# Altium PCB VESC_POWER_75100.PcbDoc (part 1 of 2)
Units mil, origin at the board's own origin, x right, y up, seen from the top; angles counter-clockwise.
Board outline 2834.65 x 2047.24 mil, 4 copper layers (Top Layer, Layer 1, Layer 2, Bottom Layer), stack 62.599 mil thick; 50 components, 18 nets, 120 pads, 1348 vias.
Unrouted connection lines stored in the file: 2.
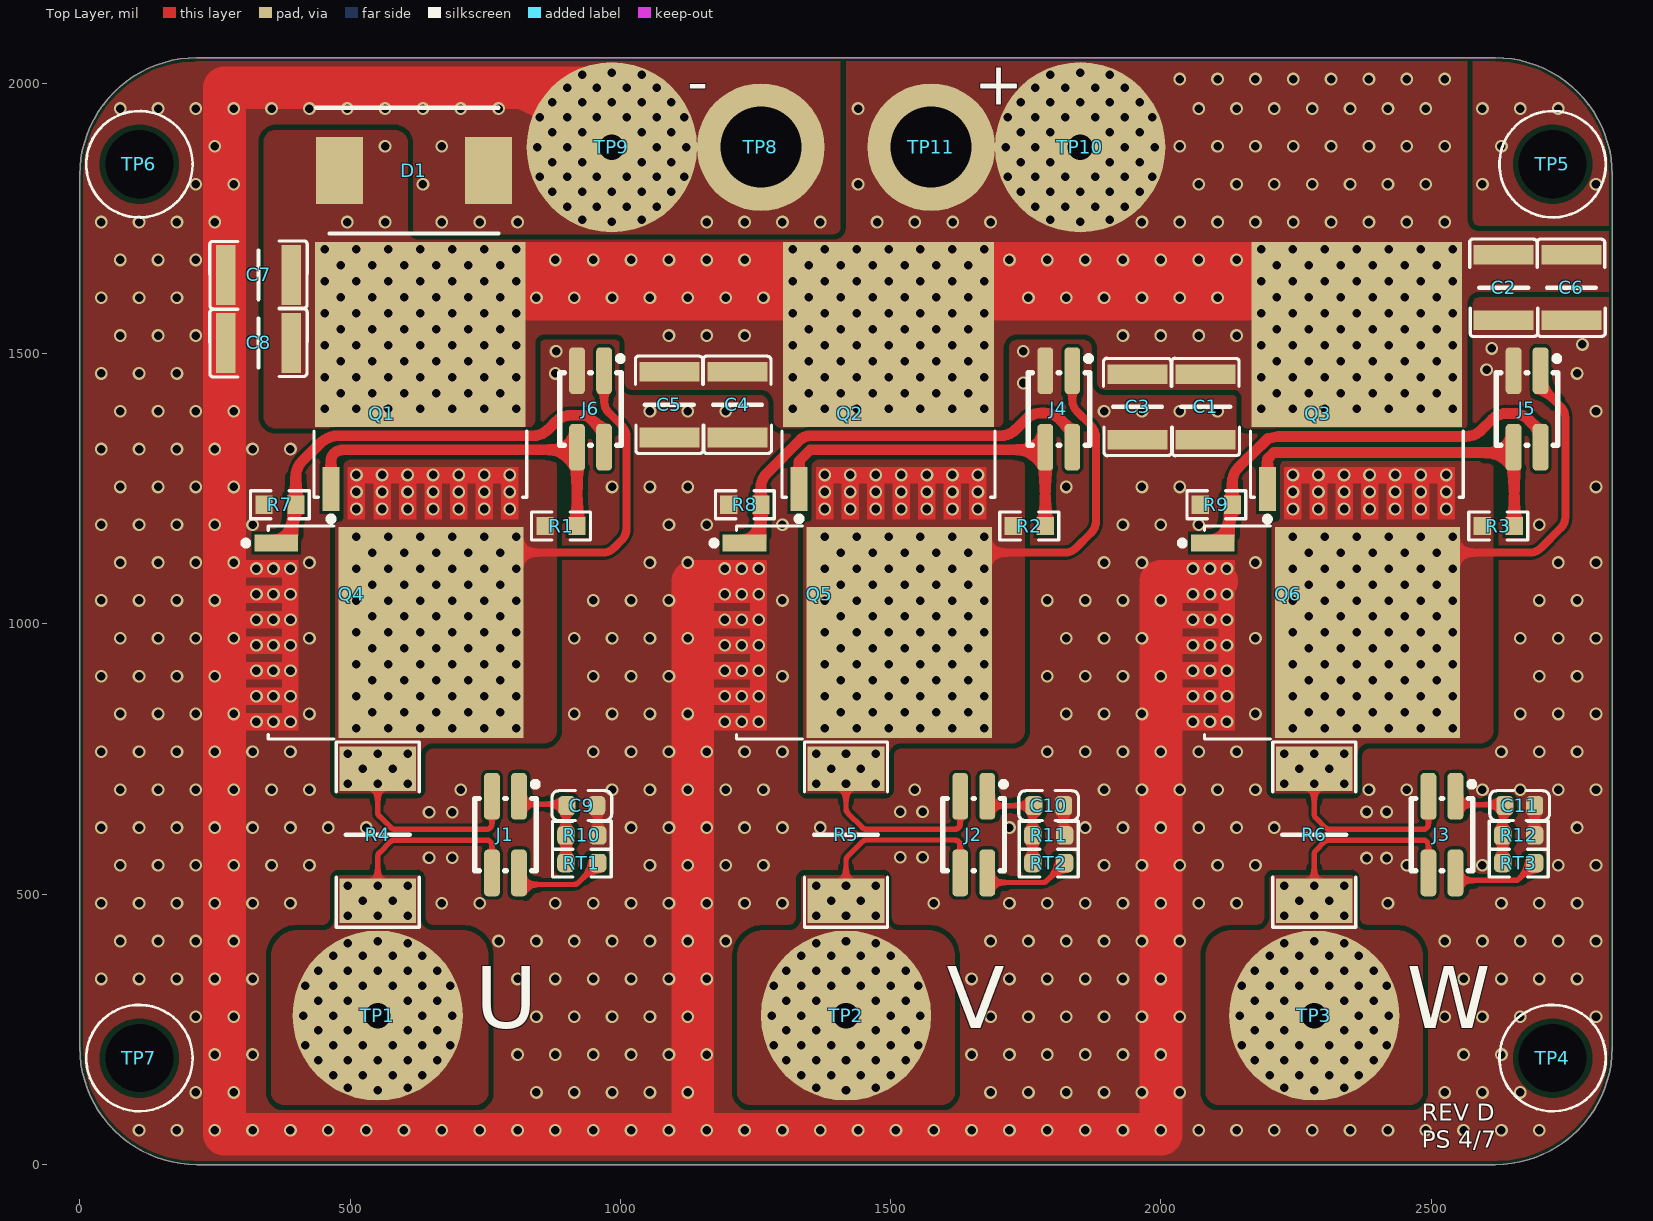
[diagram p0: Top Layer view]
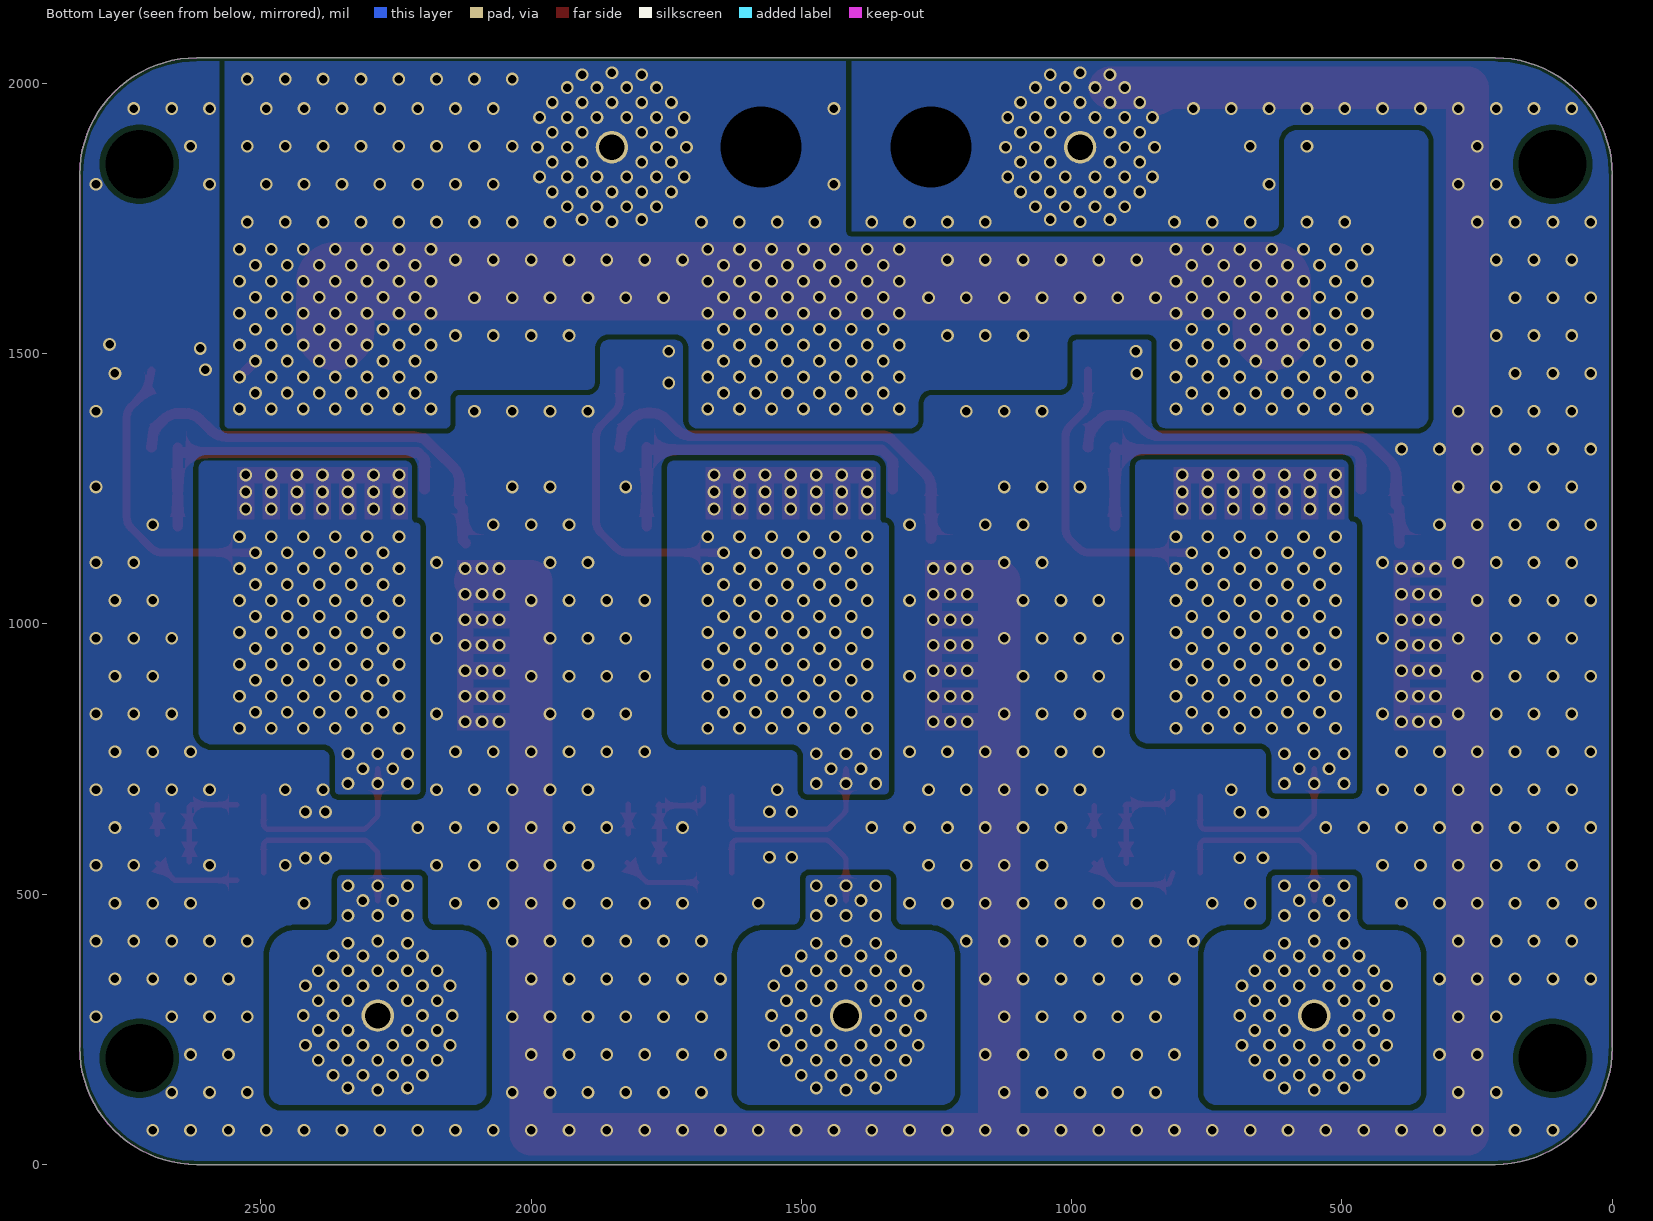
[diagram p1: Bottom Layer view, seen from below]
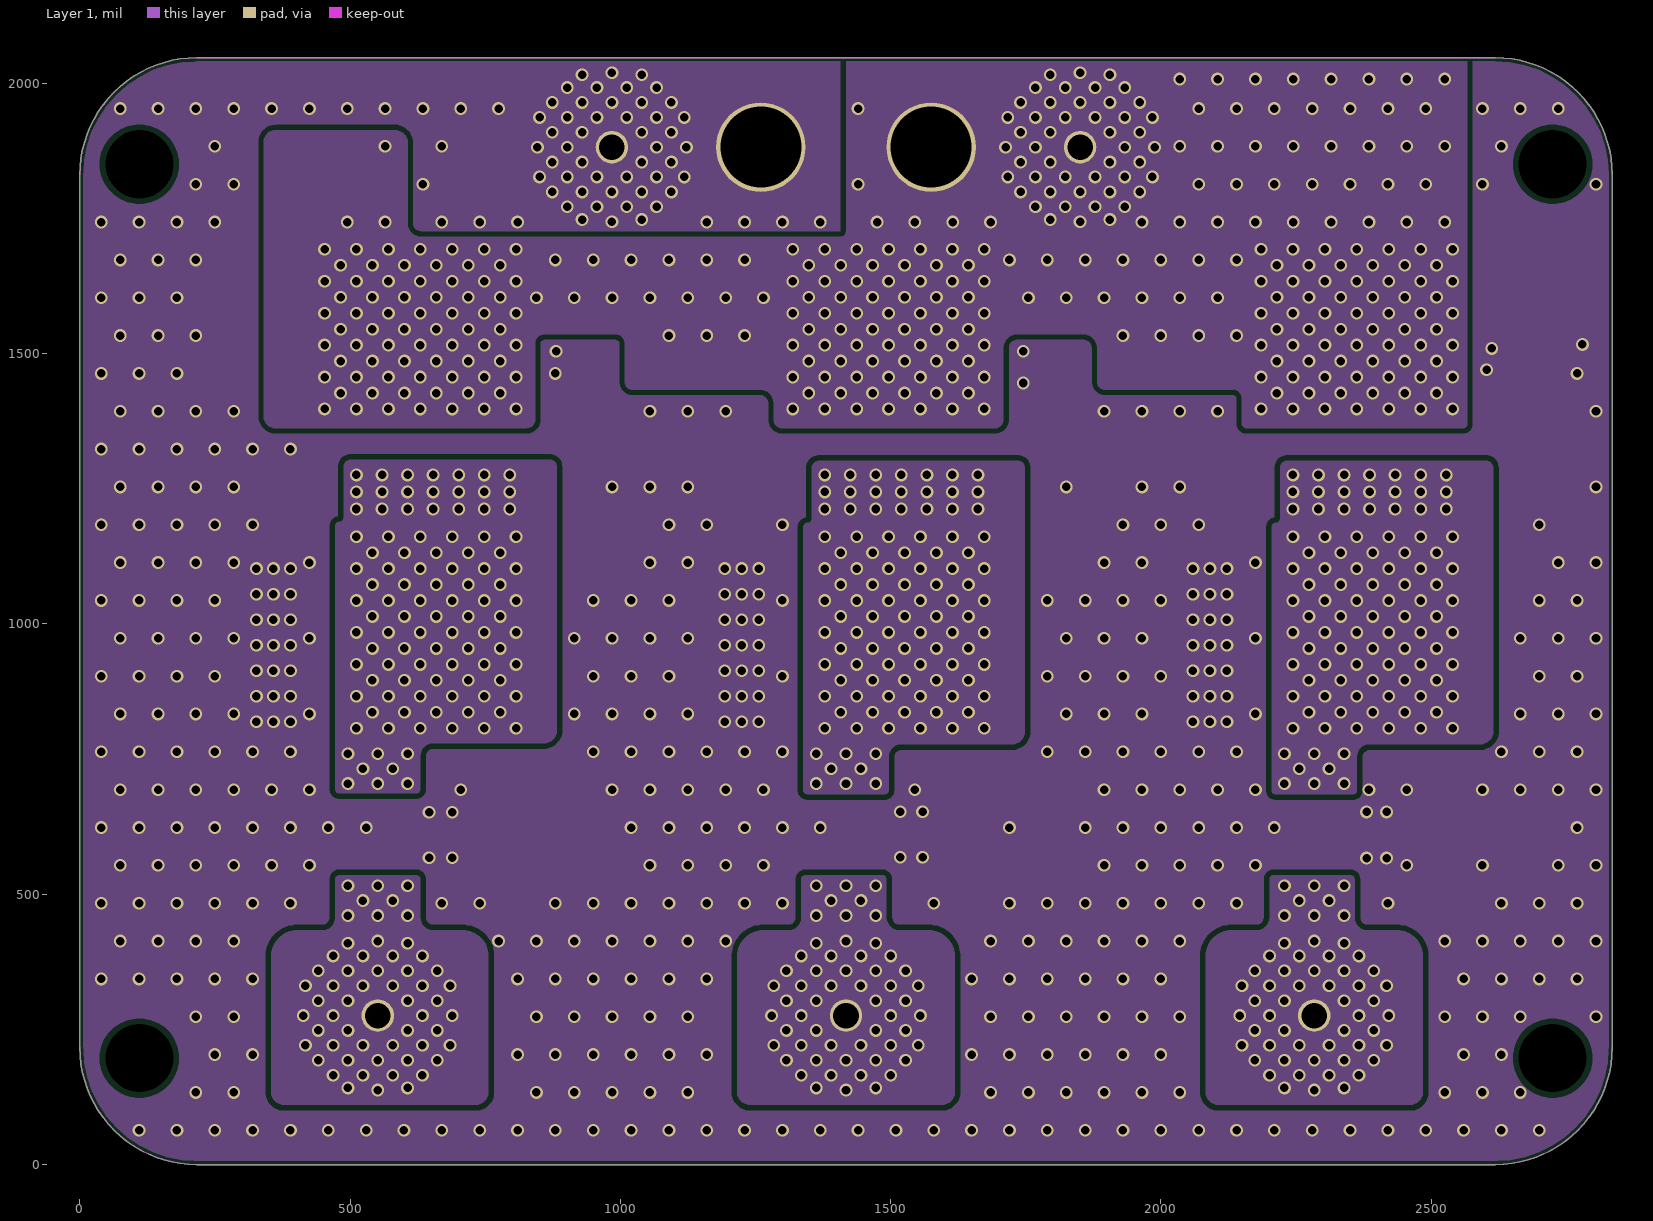
[diagram p2: Layer 1]
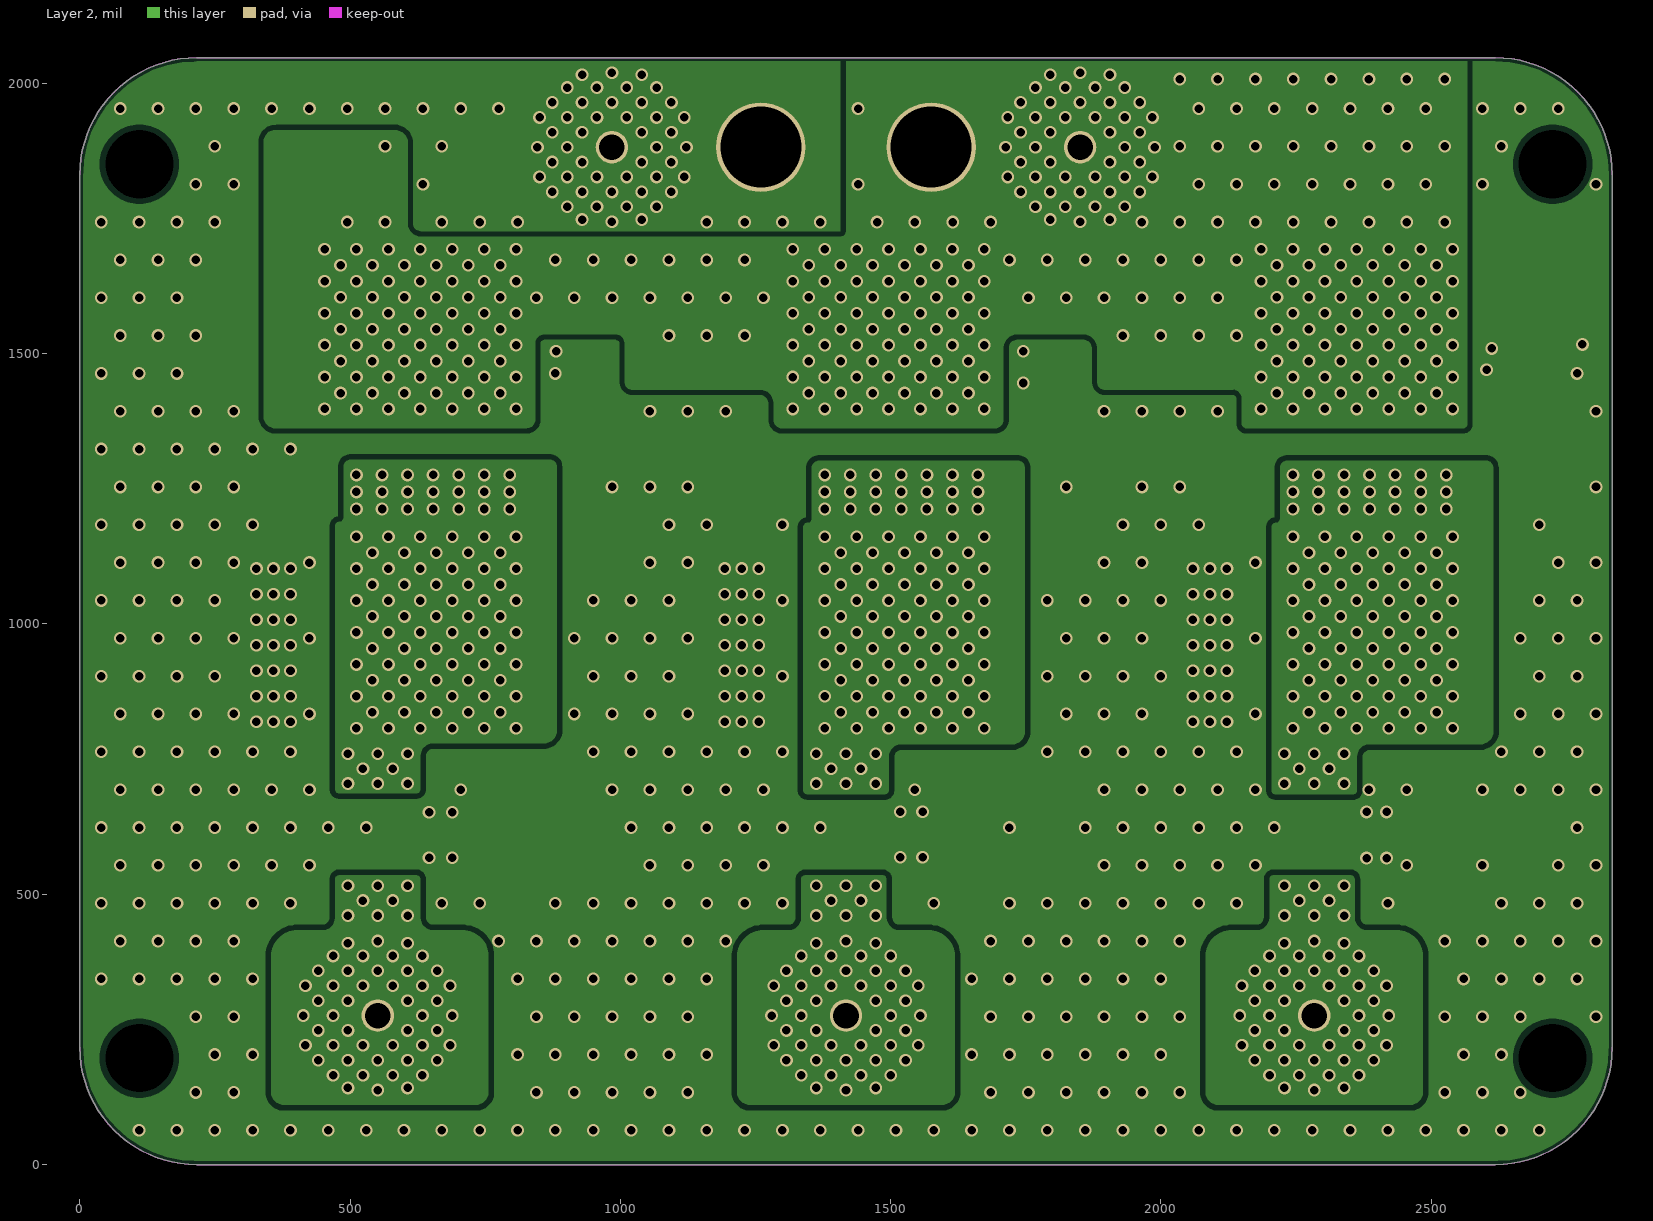
[diagram p3: Layer 2]
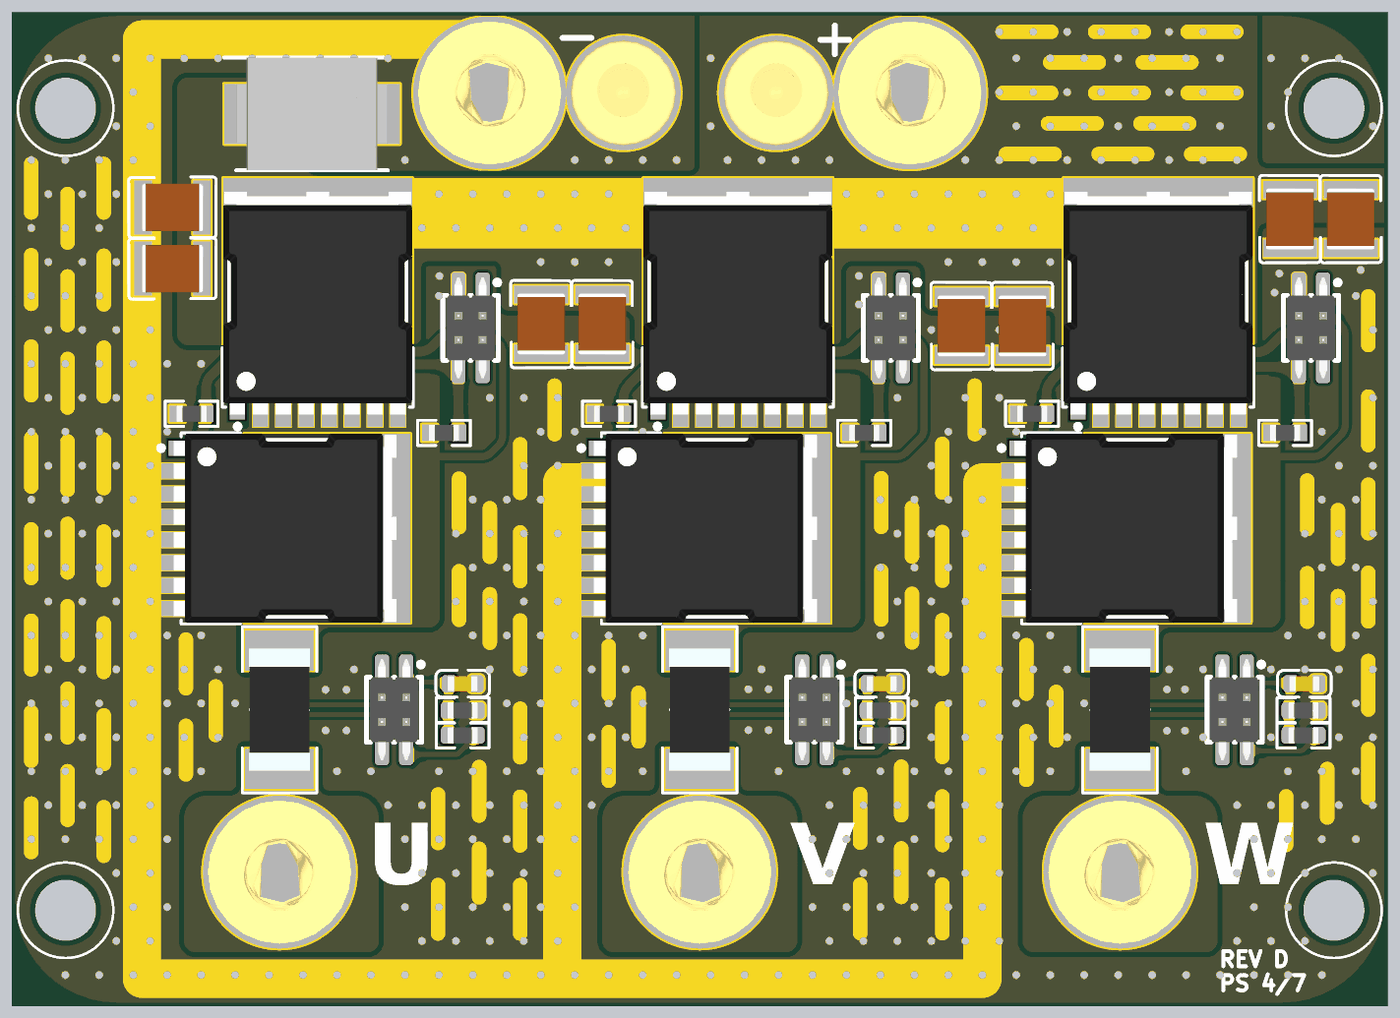
[diagram p5: 3D render of the assembled board from above, using the file's embedded part models]

## Layer stack, top to bottom
Top Solder: solder mask 0.4, Solder Resist, Dk 3.5
Top Layer: signal copper 1.378
Dielectric 2: prepreg 7.874, PP-022, Dk 4.5
Layer 1: signal copper 0.3937
Dielectric 1: core 43.3071, Core-024, Dk 4.6
Layer 2: signal copper 0.3937
Dielectric 3: prepreg 7.874, PP-022, Dk 4.5
Bottom Layer: signal copper 1.378
Bottom Solder: solder mask 0.4, Solder Resist, Dk 3.5

## Board outline
0,216.54 ccw(c216.54,216.54) 216.54,0 2618.11,0 ccw(c2618.11,216.54) 2834.65,216.54 2834.65,1830.71 ccw(c2618.11,1830.71) 2618.11,2047.24 216.54,2047.24 ccw(c216.54,1830.71) 0,1830.71

## Design rules (kind name [scope] priority, off if disabled: settings)
BoardOutlineClearance [All] p1: gap=10 ignorepadtopadclearanceinfootprint=FALSE except(0: Arc-SplitContinuation Track-SplitContinuation SMDPad-SplitContinuation THPad-SplitContinuation Via-SplitContinuation Fill-SplitContinuation Poly-SplitContinuation Region-SplitContinuation Text-SplitContinuation; 6: Arc-OutlineEdge Track-OutlineEdge SMDPad-OutlineEdge THPad-OutlineEdge Via-OutlineEdge Fill-OutlineEdge Poly-OutlineEdge Region-OutlineEdge Text-OutlineEdge)
Clearance [All] p1: gap=6 ignorepadtopadclearanceinfootprint=FALSE except(10: Fill-Fill Fill-Poly Fill-Region Fill-Text Fill-Hole Poly-Poly Poly-Region Poly-Text Poly-Hole Region-Region Region-Text Region-Hole)
HoleSize [All] p1: absolutevalues=TRUE maxlimit=196.85 minlimit=1 maxpercent=80.000 minpercent=20.000
HoleToHoleClearance [All] p1: gap=9 allowstackedmicrovias=TRUE
MinimumSolderMaskSliver [All] p1: minsoldermaskwidth=2
PolygonConnect [All] p1: connectstyle=Direct reliefconductorwidth=10 reliefentries=4 polygonreliefangle="90 Angle" airgapwidth=10
RoutingVias [All] p1: holewidth=28 width=50 viastyle="Through Hole" minholewidth=28 minwidth=50 maxholewidth=28 maxwidth=50
ShortCircuit ShortCircuit_1 [InComponent('JP1')] p1: allowed=TRUE
ShortCircuit [All] p2: allowed=FALSE
SilkToSilkClearance [All] p1: silktosilkclearance=0
SilkToSolderMaskClearance [IsPad] p1: minsilkscreentomaskgap=0 clearancetoexposedcopper=TRUE
SolderMaskExpansion [All] p1: expansion=4 istentingtop=FALSE
SupplyNets "Schematic Supply Nets_2" [InNet('VIN')] p1: voltage=0.000
SupplyNets "Schematic Supply Nets_1" [InNet('GND')] p2: voltage=0.000
SupplyNets "Schematic Supply Nets" [InNet('3V3')] p3: voltage=0.000
Width [All] p1: maxlimit=200 minlimit=6 preferedwidth=10
24 further rules are at their usual default settings.

## Components (designator, comment, footprint, x,y, rotation, side; value= is the part's Value field where it differs from the comment)
C1 "2.2uF/100V" CAPC3225X230N 2082.68,1401.57 r90 top
C2 "2.2uF/100V" CAPC3225X230N 2633.86,1622.05 r90 top
C3 "2.2uF/100V" CAPC3225X230N 1956.69,1401.58 r90 top
C4 "2.2uF/100V" CAPC3225X230N 1216.54,1405.51 r90 top
C5 "2.2uF/100V" CAPC3225X230N 1090.55,1405.51 r90 top
C6 "2.2uF/100V" CAPC3225X230N 2759.13,1622.05 r90 top
C7 "2.2uF/100V" CAPC3225X230N 330.71,1645.67 r0 top
C8 "2.2uF/100V" CAPC3225X230N 330.71,1519.69 r0 top
C9 "2.2uF/6.3V" C0603 928.68,663.93 r0 top
C10 "2.2uF/6.3V" C0603 1792.34,663.93 r0 top
C11 "2.2uF/6.3V" C0603 2663.55,663.93 r0 top
D1 "SMCJ75A" DIOM7959X262N 618.11,1838.58 r0 top
J1 "PZ127-2-02-S" HDR-SMD_4P-P1.27-V-M-R2-C2-LS5.3 787.4,610.24 r180 top locked
J2 "PZ127-2-02-S" HDR-SMD_4P-P1.27-V-M-R2-C2-LS5.3 1653.54,610.24 r180 top locked
J3 "PZ127-2-02-S" HDR-SMD_4P-P1.27-V-M-R2-C2-LS5.3 2519.68,610.24 r180 top locked
J4 "PZ127-2-02-S" HDR-SMD_4P-P1.27-V-M-R2-C2-LS5.3 1811.02,1397.64 r180 top
J5 "PZ127-2-02-S" HDR-SMD_4P-P1.27-V-M-R2-C2-LS5.3 2677.17,1397.64 r180 top
J6 "PZ127-2-02-S" HDR-SMD_4P-P1.27-V-M-R2-C2-LS5.3 944.88,1397.64 r180 top
Q1 "NCEP023N10LL" TOLL 629.92,1456.69 r90 top locked
Q2 "NCEP023N10LL" TOLL 1496.06,1456.69 r90 top locked
Q3 "NCEP023N10LL" TOLL 2362.2,1456.69 r90 top locked
Q4 "NCEP023N10LL" TOLL 570.87,984.25 r0 top locked
Q5 "NCEP023N10LL" TOLL 1437.01,984.25 r0 top locked
Q6 "NCEP023N10LL" TOLL 2303.15,984.25 r0 top locked
R1 "5.1K/1%" R0603#1 890.24,1181.1 r0 top
R2 "5.1K/1%" R0603#1 1756.38,1181.1 r0 top
R3 "5.1K/1%" R0603#1 2623.9,1181.1 r0 top
R4 "5mR/1%" R2512 551.18,610.24 r90 top locked
R5 "5mR/1%" R2512 1417.32,610.24 r90 top locked
R6 "5mR/1%" R2512 2283.46,610.24 r90 top locked
R7 "5.1K/1%" R0603#1 370.08,1220.47 r0 top
R8 "5.1K/1%" R0603#1 1230.2,1220.47 r0 top
R9 "5.1K/1%" R0603#1 2102.36,1220.47 r0 top
R10 "10K/1%" R0603#2 928.68,608.81 r180 top
R11 "10K/1%" R0603#2 1792.34,608.81 r180 top
R12 "10K/1%" R0603#2 2661.7,608.81 r180 top
RT1 "NTC" R0603#2 928.68,557.63 r180 top
RT2 "NTC" R0603#2 1792.34,557.63 r180 top
RT3 "NTC" R0603#2 2661.7,557.63 r180 top
TP1 "PHA" TP_8X8 551.18,275.59 r0 top locked
TP2 "PHB" TP_8X8 1417.32,275.59 r0 top locked
TP3 "PHC" TP_8X8 2283.46,275.59 r0 top locked
TP4 "TEST POINT" HOLE-3.2MM_M 2724.41,196.85 r0 top
TP5 "TEST POINT" HOLE-3.2MM_M 2724.41,1850.39 r0 top
TP6 "TEST POINT" HOLE-3.2MM_M 110.24,1850.39 r0 top
TP7 "TEST POINT" HOLE-3.2MM_M 110.24,196.85 r0 top
TP8 "VIN" TP_6x6 1259.84,1881.89 r180 top
TP9 "VIN" TP_8X8 984.25,1881.89 r180 top locked
TP10 "GND" TP_8X8 1850.39,1881.89 r180 top locked
TP11 "GND" TP_6x6 1574.8,1881.89 r180 top

## Footprints (in the part's own frame and the unit in brackets; to place one, negate y for a bottom-side part, rotate by r counter-clockwise, add the part's x,y. Pads: shape width x height; smd on the part's side, far side on the other; paste and mask are expansions set on the pad)
C0603 [mm] "C0603"
  rrect50% 0.8x0.9 smd: 1(-0.7,0) 2(0.7,0)
  silkscreen extent -1.41,-0.7 1.4,0.7, body extent -0.8,-0.41 0.8,0.41, height 0.9
CAPC3225X230N [mm]
  rect 0.92x2.82 smd: 1(-1.54,0) 2(1.54,0)
  silkscreen extent -2.3,-1.6 2.28,1.6, body extent -1.6,-1.25 1.6,1.25, height 2.47
DIOM7959X262N [mm]
  rect 2.2x3.15 smd: 1(-3.5,0) 2(3.5,0)
  silkscreen extent -4.6,-2.95 3.97,2.95, body extent -3.97,-2.95 3.97,2.95, height 2.31
HDR-SMD_4P-P1.27-V-M-R2-C2-LS5.3 [mm]
  rrect50% 0.74x2.2 smd paste+0 mask+0.05: 1(-0.635,-1.8) 2(-0.635,1.8) 3(0.635,-1.8) 4(0.635,1.8)
  silkscreen extent -1.52,-2.49 1.45,1.7, body extent -1.27,-2.65 1.27,2.65, height 5.5
HOLE-3.2MM_M [mm]
  round 0 hole 3.2 unplated: 1(0,0)
  silkscreen extent -2.5,-2.5 2.5,2.5
R0603#1 [mil] "R0603"
  rect 31.73x34.02 smd: 1(-29.65,0) 2(29.65,0)
  silkscreen extent -55,-26 55,26, body extent -31,-17 31,17, height 20
R0603#2 [mil] "R0603"
  rrect50% 31.73x34.02 smd: 1(-29.65,0) 2(29.65,0)
  silkscreen extent -55,-26 55,26, body extent -31,-17 31,17, height 20
R2512 [mm]
  rect 2.1x3.6 smd: 1(-3.1,0) 2(3.1,0)
  silkscreen extent -4.35,-1.95 4.35,1.95, body extent -3.2,-1.6 3.2,1.6, height 0.8
TOLL [mm] "TOLL"
  rect 2.063x0.8 smd: 1(-5.269,4.2)
  rect 8.7x9.9 smd: 2(2,0)
  oct 0.025x0.025 smd: 3(-5.46,-0.6)
  round 0.025 smd: 3(-5.46,-0.6)
  Top Layer region: -6.691,3.4 -4.228,3.4 -4.228,-4.6 -6.691,-4.6 -6.691,-3.8 -4.991,-3.8 -4.991,-3.4 -6.691,-3.4 -6.691,-2.6 -4.991,-2.6 -4.991,-2.2 -6.691,-2.2 -6.691,-1.4 -4.991,-1.4 -4.991,-1 -6.691,-1 -6.691,-0.2 -4.991,-0.2 -4.991,0.2 -6.691,0.2 -6.691,1 -4.991,1 -4.991,1.4 -6.691,1.4 -6.691,2.2 -4.991,2.2 -4.991,2.6 -6.691,2.6
  silkscreen extent -6.79,-5 -2.55,5, body extent -6.04,-4.95 5.63,4.95, height 2.3
TP_6x6 [mm] "TP_6x6"
  round 6 smd: 1(0,0)
  round 4.2 / inner round 4.2 / far side round 0 hole 3.8 mask+0.102: 1(0,0)
  body extent -2.75,-2.75 2.74,2.75, height 6
TP_8X8 [mm] "TP_8X8"
  round 8 smd: 1(0,0)
  round 1.524 hole 1.2: 1(0,0)
  body extent -3.75,-3.75 3.74,3.75, height 20

## Part data
C1 C2 C3 C4 C5 C6 C7 C8 C9 C10 C11: library part "CAP NP"
  C1 C2 C3 C4 C5 C6 C7 C8: PCB Footprint=C1206
  C9 C10 C11: PCB Footprint=C0603
D1: "TVS Diode (Uni-directional)", Manufacturer_Name=Bourns, Mouser Part Number=652-SMCJ75A, Arrow Part Number=SMCJ75A, Arrow Price/Stock=https://www.arrow.com/en/products/smcj75a/bourns?region=nac, Datasheet Link=https://www.bourns.com/docs/Product-Datasheets/SMCJ.pdf, Height=2.62mm, Manufacturer_Part_Number=SMCJ75A, Mouser Price/Stock=https://www.mouser.co.uk/ProductDetail/Bourns/SMCJ75A?qs=%252Bf8Cd6aE5bzxrdYbQ%252Bf9mA%3D%3D
J1 J2 J3 J4 J5 J6: Color=黑色, Current Rating (Max)=1A, JLCPCB Part Class="Extended Part", LCSC Part Name="2x2P 间距:1.27mm 方针 立贴", Manufacturer=HCTL(华灿天禄), Operating Temperature Range=-40℃~+105℃, Soldering Temperature(Max)=260℃@10S, Add into BOM=yes, Circluar Pins/Square Pins=方针, Contact Material=黄铜, Convert to PCB=yes, Datasheet=https://atta.szlcsc.com/upload/public/pdf/source/20230609/2ACB07ADC7D4DAF6D292F3D23C037F6C.pdf, Device=PZ127-2-02-S, Insulation Height=1.5mm, Length of End Connection Pin=-, Length of Mating Pin=4mm, Manufacturer Part=PZ127-2-02-S, Mounting Type=立贴, Number of Pins=4P, Number of Rows=双排, Pin Structure=2x2P, Pitch=1.27mm, Row Spacing=1.27mm, Supplier=LCSC, Supplier Footprint=SMD,P=1.27mm, Supplier Part=C3975185, Symbol=PZ127-2-02-S
Q1 Q2 Q3 Q4 Q5 Q6: library part "MOSFET N", PCB Footprint=TOLL
R1 R2 R3 R4 R5 R6 R7 R8 R9 R10 R11 R12: library part RESISTOR
  R1 R2 R3 R7 R8 R9 R10 R11 R12: PCB Footprint=R0603
  R4 R5 R6: PCB Footprint=R3920
TP1 TP2 TP3 TP8 TP9 TP10 TP11: library part "TEST POINT", PCB Footprint=TP_8x8
RT1 RT2 RT3: PCB Footprint=R0603

## Via types
v1: diameter 23.62, hole 15.75, Top Layer to Bottom Layer, tented both sides, 1348 vias

## Nets (pads, with @x,y where several pads share a name; then routed paths per layer and width w, separated by ;. In a path a pad name is that pad's centre, name@x,y a point inside that pad or via, vN(x,y) a via of type N, cw(c..) or ccw(c..) an arc to the next point about the centre after c; other vN are vias at no path point)
3V3: J1.2 J2.2 J3.2 RT1.1 RT2.1 RT3.1 | length 478.8
  Top Layer w10: J1.2@812.4,539.37 819.69,520.14 820.67,519.53 ccw(c825.94,528.03) 825.94,518.03 914.59,518.03 ccw(c914.59,528.03) 921.65,520.95 RT1.1@958.33,557.63 ; J2.2@1692.91,521.66 1781.43,521.66 ccw(c1781.43,531.66) 1788.48,524.57 1814.05,550.14 RT2.1@1821.98,558.07 ; J3.2@2544.68,525.65 2655.22,525.65 ccw(c2655.22,535.65) 2662.27,528.56 RT3.1@2691.34,557.63
ADC_TEMP: C9.1 J1.1 R10.2 RT1.2 | length 213.5
  Top Layer w10: J1.1@813.07,689.86 813.07,675.55 821.79,666.82 898.23,666.82 C9.1@901.12,663.93 ; RT1.2@899.04,557.63 R10.2@899.04,608.81 C9.1@899.04,663.93
ADC_TEMP2: C10.1 J2.1 R11.2 RT2.2 | length 218.2
  Top Layer w10: J2.1@1681.09,696.12 1681.09,670.77 1687.94,663.93 C10.1@1764.78,663.93 ; RT2.2@1762.69,560.32 1762.69,611.5 C10.1@1762.69,666.62
ADC_TEMP3: C11.1 J3.1 R12.2 RT3.2 | length 191.1
  Top Layer w10: J3.1@2544.64,665.67 2628.11,665.67 2632.05,662.1 R12.2@2632.05,608.81 RT3.2@2632.05,559.74
GHA: J6.4 Q1.1 R1.2 | length 652.2
  Top Layer w20: Q1.1@464.57,1249.25 464.57,1301.32 cw(c484.57,1301.26) 477.85,1320.09 cw(c489.89,1286.28) 489.89,1322.17 915.31,1322.17 J6.4@919.88,1326.77 ; R1.2@919.88,1181.1 J6.4@919.88,1312.56
GHB: J4.4 Q2.1 R2.2 | length 659.8
  Top Layer w20: Q2.1@1330.71,1249.25 1330.71,1301.81 1351.07,1322.17 1377.95,1322.17 1781.46,1322.17 J4.4@1783.82,1322.17 ; R2.2@1786.02,1181.1 J4.4@1786.02,1326.77
GHC: J5.4 Q3.1 R3.2 | length 661.7
  Top Layer w20: Q3.1@2196.85,1249.25 2196.85,1303.18 cw(c2210.58,1303.18) 2197.03,1305.37 2208.39,1316.73 cw(c2210.58,1303.18) 2210.58,1316.91 J5.4@2653.54,1316.91 ; R3.2@2653.54,1181.1 J5.4@2653.54,1325.39
GLA: J6.2 Q4.1 R7.2 | length 783.6
  Top Layer w20: Q4.1@393.7,1149.61 394.04,1155.35 394.04,1213.46 R7.2@399.72,1220.47 399.72,1272.92 cw(c439.72,1272.92) 411.41,1301.17 443.18,1332.95 cw(c481.97,1294.11) 463.94,1345.95 cw(c477.08,1308.17) 477.08,1348.17 838.15,1348.17 ccw(c838.15,1388.17) 866.4,1359.85 880.94,1374.4 cw(c909.19,1346.08) 909.19,1386.08 930.64,1386.08 cw(c930.64,1366.08) 944.64,1380.36 965.31,1360.08 J6.2@969.88,1326.77
GLB: J4.2 Q5.1 R8.2 | length 770.7
  Top Layer w20: Q5.1@1259.84,1157.48 1259.84,1251.15 cw(c1299.84,1251.15) 1271.52,1279.4 1332.72,1340.59 cw(c1351.07,1322.17) 1351.07,1348.17 1703.12,1348.17 ccw(c1703.12,1388.17) 1731.37,1359.85 1750.07,1378.56 cw(c1778.32,1350.24) 1778.32,1390.24 1784.73,1390.24 cw(c1784.73,1350.24) 1812.98,1378.56 J4.2@1824.34,1367.19 ; J4.2@1824.37,1367.16 1831.46,1360.08 J4.2@1836.02,1326.77
GLC: J5.2 Q6.1 R9.2 | length 782.1
  Top Layer w20: Q6.1@2120.57,1149.61 2126.32,1155.35 2126.32,1213.46 R9.2@2132.01,1220.47 2132.01,1261.71 cw(c2172.01,1261.71) 2143.68,1289.95 cw(c2157.81,1275.79) 2143.82,1290.09 2197.8,1342.91 2217.21,1346.91 2564.3,1346.91 ccw(c2564.3,1386.91) 2592.55,1358.59 2611.76,1377.81 cw(c2640.01,1349.49) 2640.01,1389.49 2651.62,1389.49 cw(c2651.62,1349.49) 2679.87,1377.81 J5.2@2690.48,1367.19 ; J5.2@2690.51,1367.16 2697.6,1360.08 J5.2@2702.17,1326.77
GND: C1.1 C2.1 C3.1 C4.1 C5.1 C6.1 C7.1 C8.1 C9.2 C10.2 C11.2 D1.2 J4.3 J5.3 J6.3 Q4.3 Q5.3 Q6.3 R7.1 R8.1 R9.1 R10.1 R11.1 R12.1 TP8.1 TP9.1 | length 12017.4
  Top Layer w10: R10.1@958.33,608.81 C9.2@958.33,663.93 ; R11.1@1819.9,611.5 C10.2@1819.9,666.62 ; R12.1@2691.1,610.92 C11.2@2691.1,666.04
  Top Layer w78.74: 267.72,273.43 267.72,63.43 ; 267.72,483.43 267.72,63.43 ; 267.72,623.43 267.72,63.43 ; 267.72,833.43 267.72,63.43 ; 267.72,1043.43 267.72,63.43 ; 267.72,1183.43 267.72,63.43 ; 424.68,1992.13 267.72,1992.13 ; v1@529.68,55.66 267.72,55.66 ; 530.42,1992.13 267.72,1992.13 ; 634.68,1992.13 267.72,1992.13 ; TP9.1@929.13,1992.13 v1(901.57,1992.13) 810.42,1992.13 267.72,1992.13 ; v1@1159.68,55.66 1133.86,55.66 ; 1224.6,1078.74 1133.86,1078.74 1133.86,903.43 1133.86,763.43 1133.86,553.43 1133.86,273.43 1133.86,133.43 1133.86,55.66 ; v1@1439.68,55.66 1859.68,55.66 v1@2000,55.66 ; v1@1509.68,55.66 1133.86,55.66 ; 2000,133.43 v1@2000,55.66 ; 2102.76,1078.74 2000,1078.74 2000,973.43 2000,483.43 2000,343.43 v1@2000,55.66 ; 267.72,55.66 949.68,55.66 1133.86,55.66 ; 267.72,55.66 267.72,63.43 ; 267.72,63.43 267.72,1323.43 267.72,1795.28 267.72,1992.13
  other v1: 109.68,63.43 179.68,63.43 249.68,63.43 319.68,63.43 389.68,63.43 459.68,63.43 529.68,63.43 599.68,63.43 669.68,63.43 739.68,63.43 809.68,63.43 879.68,63.43 949.68,63.43 1019.68,63.43 1089.68,63.43 1159.68,63.43 1229.68,63.43 1299.68,63.43 1369.68,63.43 1439.68,63.43 1509.68,63.43 1579.68,63.43 1649.68,63.43 1719.68,63.43 1789.68,63.43 1859.68,63.43 1929.68,63.43 1999.68,63.43 2069.68,63.43 2139.68,63.43 2209.68,63.43 2279.68,63.43 2349.68,63.43 2419.68,63.43 2489.68,63.43 2559.68,63.43 2629.68,63.43 2699.68,63.43 214.68,133.43 284.68,133.43 844.68,133.43 914.68,133.43 984.68,133.43 1054.68,133.43 1124.68,133.43 1684.68,133.43 1754.68,133.43 1824.68,133.43 1894.68,133.43 1964.68,133.43 2034.68,133.43 2524.68,133.43 2594.68,133.43 2664.68,133.43 249.68,203.43 319.68,203.43 809.68,203.43 879.68,203.43 949.68,203.43 1019.68,203.43 1089.68,203.43 1159.68,203.43 1649.68,203.43 1719.68,203.43 1789.68,203.43 1859.68,203.43 1929.68,203.43 1999.68,203.43 2559.68,203.43 2629.68,203.43 214.68,273.43 284.68,273.43 844.68,273.43 914.68,273.43 984.68,273.43 1054.68,273.43 1124.68,273.43 1684.68,273.43 1754.68,273.43 1824.68,273.43 1894.68,273.43 1964.68,273.43 2034.68,273.43 2524.68,273.43 2594.68,273.43 2664.68,273.43 2804.68,273.43 39.68,343.43 109.68,343.43 179.68,343.43 249.68,343.43 319.68,343.43 809.68,343.43 879.68,343.43 949.68,343.43 1019.68,343.43 1089.68,343.43 1159.68,343.43 1649.68,343.43 1719.68,343.43 1789.68,343.43 1859.68,343.43 1929.68,343.43 1999.68,343.43 2559.68,343.43 2629.68,343.43 2699.68,343.43 2769.68,343.43 74.68,413.43 144.68,413.43 214.68,413.43 284.68,413.43 774.68,413.43 844.68,413.43 914.68,413.43 984.68,413.43 1054.68,413.43 1124.68,413.43 1194.68,413.43 1684.68,413.43 1754.68,413.43 1824.68,413.43 1894.68,413.43 1964.68,413.43 2034.68,413.43 2524.68,413.43 2594.68,413.43 2664.68,413.43 2734.68,413.43 2804.68,413.43 39.68,483.43 109.68,483.43 179.68,483.43 249.68,483.43 319.68,483.43 389.68,483.43 669.68,483.43 739.68,483.43 879.68,483.43 949.68,483.43 1019.68,483.43 1089.68,483.43 1159.68,483.43 1229.68,483.43 1299.68,483.43 1579.68,483.43 1719.68,483.43 1789.68,483.43 1859.68,483.43 1929.68,483.43 1999.68,483.43 2069.68,483.43 2139.68,483.43 2419.68,483.43 2629.68,483.43 2699.68,483.43 2769.68,483.43 74.68,553.43 144.68,553.43 214.68,553.43 284.68,553.43 354.68,553.43 424.68,553.43 1054.68,553.43 1124.68,553.43 1194.68,553.43 1264.68,553.43 1894.68,553.43 1964.68,553.43 2034.68,553.43 2104.68,553.43 2174.68,553.43 2454.68,553.43 2594.68,553.43 2734.68,553.43 2804.68,553.43 646.2,567.41 688.98,567.41 2380.26,566.93 2417.32,566.93 1517.69,568.32 1559.06,568.32 39.68,623.43 109.68,623.43 179.68,623.43 249.68,623.43 319.68,623.43 389.68,623.43 459.68,623.43 529.68,623.43 1019.68,623.43 1089.68,623.43 1159.68,623.43 1229.68,623.43 1299.68,623.43 1369.68,623.43 1719.68,623.43 1859.68,623.43 1929.68,623.43 1999.68,623.43 2069.68,623.43 2139.68,623.43 2209.68,623.43 2769.68,623.43 646.2,651.48 688.98,651.48 1517.69,652.4 1559.06,652.4 2380.26,652.21 2417.32,652.21 74.68,693.43 144.68,693.43 214.68,693.43 284.68,693.43 354.68,693.43 424.68,693.43 704.68,693.43 984.68,693.43 1054.68,693.43 1124.68,693.43 1194.68,693.43 1264.68,693.43 1544.68,693.43 1894.68,693.43 1964.68,693.43 2034.68,693.43 2104.68,693.43 2174.68,693.43 2384.68,693.43 2454.68,693.43 2594.68,693.43 2664.68,693.43 2734.68,693.43 2804.68,693.43 39.68,763.43 109.68,763.43 179.68,763.43 249.68,763.43 319.68,763.43 389.68,763.43 949.68,763.43 1019.68,763.43 1089.68,763.43 1159.68,763.43 1229.68,763.43 1299.68,763.43 1789.68,763.43 1859.68,763.43 1929.68,763.43 1999.68,763.43 2069.68,763.43 2139.68,763.43 2629.68,763.43 2699.68,763.43 2769.68,763.43 326.77,818.9 358.27,818.9 389.76,818.9 1192.91,818.9 1224.41,818.9 1255.91,818.9 2059.06,818.9 2090.55,818.9 2122.05,818.9 74.68,833.43 144.68,833.43 214.68,833.43 284.68,833.43 424.68,833.43 914.68,833.43 984.68,833.43 1054.68,833.43 1124.68,833.43 1824.68,833.43 1894.68,833.43 1964.68,833.43 2174.68,833.43 2664.68,833.43 2734.68,833.43 2804.68,833.43 326.77,866.14 358.27,866.14 389.76,866.14 1192.91,866.14 1224.41,866.14 1255.91,866.14 2059.06,866.14 2090.55,866.14 2122.05,866.14 39.68,903.43 109.68,903.43 179.68,903.43 249.68,903.43 949.68,903.43 1019.68,903.43 1089.68,903.43 1299.68,903.43 1789.68,903.43 1859.68,903.43 1929.68,903.43 1999.68,903.43 2699.68,903.43 2769.68,903.43 326.77,913.39 358.27,913.39 389.76,913.39 1192.91,913.39 1224.41,913.39 1255.91,913.39 2059.06,913.39 2090.55,913.39 2122.05,913.39 326.77,960.63 358.27,960.63 389.76,960.63 1192.91,960.63 1224.41,960.63 1255.91,960.63 2059.06,960.63 2090.55,960.63 2122.05,960.63 74.68,973.43 144.68,973.43 214.68,973.43 284.68,973.43 424.68,973.43 914.68,973.43 984.68,973.43 1054.68,973.43 1124.68,973.43 1824.68,973.43 1894.68,973.43 1964.68,973.43 2174.68,973.43 2664.68,973.43 2734.68,973.43 2804.68,973.43 326.77,1007.87 358.27,1007.87 389.76,1007.87 1192.91,1007.87 1224.41,1007.87 1255.91,1007.87 2059.06,1007.87 2090.55,1007.87 2122.05,1007.87 39.68,1043.43 109.68,1043.43 179.68,1043.43 249.68,1043.43 949.68,1043.43 1019.68,1043.43 1089.68,1043.43 1299.68,1043.43 1789.68,1043.43 1859.68,1043.43 1929.68,1043.43 1999.68,1043.43 2699.68,1043.43 2769.68,1043.43 326.77,1055.12 358.27,1055.12 389.76,1055.12 1192.91,1055.12 1224.41,1055.12 1255.91,1055.12 2059.06,1055.12 2090.55,1055.12 2122.05,1055.12 326.77,1102.36 358.27,1102.36 389.76,1102.36 1192.91,1102.36 1224.41,1102.36 1255.91,1102.36 2059.06,1102.36 2090.55,1102.36 2122.05,1102.36 74.68,1113.43 144.68,1113.43 214.68,1113.43 284.68,1113.43 424.68,1113.43 1054.68,1113.43 1124.68,1113.43 1894.68,1113.43 1964.68,1113.43 2174.68,1113.43 2734.68,1113.43 2804.68,1113.43 39.68,1183.43 109.68,1183.43 179.68,1183.43 249.68,1183.43 319.68,1183.43 1089.68,1183.43 1159.68,1183.43 1299.68,1183.43 1929.68,1183.43 1999.68,1183.43 2069.68,1183.43 2699.68,1183.43 74.68,1253.43 144.68,1253.43 214.68,1253.43 284.68,1253.43 984.68,1253.43 1054.68,1253.43 1124.68,1253.43 1824.68,1253.43 1964.68,1253.43 2034.68,1253.43 2804.68,1253.43 39.68,1323.43 109.68,1323.43 179.68,1323.43 249.68,1323.43 319.68,1323.43 389.68,1323.43 74.68,1393.43 144.68,1393.43 214.68,1393.43 284.68,1393.43 1054.68,1393.43 1124.68,1393.43 1194.68,1393.43 1894.68,1393.43 1964.68,1393.43 2034.68,1393.43 2104.68,1393.43 2804.68,1393.43 1745.39,1445.68 39.68,1463.43 109.68,1463.43 179.68,1463.43 879.68,1463.43 2769.68,1463.43 2602.19,1470.18 880.94,1504.53 1745.39,1504.53 2611.76,1509.71 2779.53,1517.04 74.68,1533.43 144.68,1533.43 214.68,1533.43 39.68,1603.43 109.68,1603.43 179.68,1603.43 74.68,1673.43 144.68,1673.43 214.68,1673.43 39.68,1743.43 109.68,1743.43 179.68,1743.43 249.68,1743.43 669.68,1743.43 739.68,1743.43 809.68,1743.43 1159.68,1743.43 1229.68,1743.43 1299.68,1743.43 1369.68,1743.43 984.25,1744.09 929.13,1748.03 1039.37,1748.03 901.57,1771.65 956.69,1771.65 1011.81,1771.65 1066.93,1771.65 874.02,1799.21 929.13,1799.21 984.25,1799.21 1039.37,1799.21 1094.49,1799.21 214.68,1813.43 284.68,1813.43 634.68,1813.43 2594.68,1813.43 2804.68,1813.43 850.39,1826.77 901.57,1826.77 956.69,1826.77 1011.81,1826.77 1066.93,1826.77 1118.11,1826.77 874.02,1854.33 929.13,1854.33 1039.37,1854.33 1094.49,1854.33 846.46,1881.89 901.57,1881.89 1066.93,1881.89 1122.05,1881.89 249.68,1883.43 669.68,1883.43 2629.68,1883.43 874.02,1909.45 929.13,1909.45 1039.37,1909.45 1094.49,1909.45 850.39,1937.01 901.57,1937.01 956.69,1937.01 1011.81,1937.01 1066.93,1937.01 1118.11,1937.01 74.68,1953.43 144.68,1953.43 214.68,1953.43 284.68,1953.43 354.68,1953.43 424.68,1953.43 494.68,1953.43 564.68,1953.43 634.68,1953.43 704.68,1953.43 774.68,1953.43 2594.68,1953.43 2664.68,1953.43 2734.68,1953.43 874.02,1964.57 929.13,1964.57 984.25,1964.57 1039.37,1964.57 1094.49,1964.57 956.69,1992.13 1011.81,1992.13 1066.93,1992.13 929.13,2015.75 1039.37,2015.75 984.25,2019.69
PHA: J1.4 R4.1 TP1.1 | length 363.3
  Top Layer w10: R4.1@551.18,488.19 551.18,569.6 cw(c561.18,569.6) 554.09,576.65 574.68,597.24 cw(c581.74,590.16) 581.74,600.16 752.4,600.16 cw(c752.4,590.16) 762.4,590.16 J1.4@762.4,539.37
  other v1: 551.18,137.8 496.06,141.73 606.3,141.73 468.5,165.35 523.62,165.35 578.74,165.35 633.86,165.35 440.94,192.91 496.06,192.91 551.18,192.91 606.3,192.91 661.42,192.91 417.32,220.47 468.5,220.47 523.62,220.47 578.74,220.47 633.86,220.47 685.04,220.47 440.94,248.03 496.06,248.03 606.3,248.03 661.42,248.03 413.39,275.59 468.5,275.59 633.86,275.59 688.98,275.59 440.94,303.15 496.06,303.15 606.3,303.15 661.42,303.15 417.32,330.71 468.5,330.71 523.62,330.71 578.74,330.71 633.86,330.71 685.04,330.71 440.94,358.27 496.06,358.27 551.18,358.27 606.3,358.27 661.42,358.27 468.5,385.83 523.62,385.83 578.74,385.83 633.86,385.83 496.06,409.45 606.3,409.45 551.18,413.39 496.06,460.63 551.18,460.63 606.3,460.63 523.62,488.19 578.74,488.19 496.06,515.75 551.18,515.75 606.3,515.75
PHB: J2.4 R5.1 TP2.1 | length 359.6
  Top Layer w10: R5.1@1417.32,488.19 1417.32,562.79 cw(c1427.32,562.79) 1420.24,569.84 1447.83,597.43 cw(c1454.88,590.35) 1454.88,600.35 1618.54,600.35 cw(c1618.54,590.35) 1628.54,590.35 J2.4@1628.54,539.37
  other v1: 1417.32,137.8 1362.2,141.73 1472.44,141.73 1334.65,165.35 1389.76,165.35 1444.88,165.35 1500,165.35 1307.09,192.91 1362.2,192.91 1417.32,192.91 1472.44,192.91 1527.56,192.91 1283.46,220.47 1334.65,220.47 1389.76,220.47 1444.88,220.47 1500,220.47 1551.18,220.47 1307.09,248.03 1362.2,248.03 1472.44,248.03 1527.56,248.03 1279.53,275.59 1334.65,275.59 1500,275.59 1555.12,275.59 1307.09,303.15 1362.2,303.15 1472.44,303.15 1527.56,303.15 1283.46,330.71 1334.65,330.71 1389.76,330.71 1444.88,330.71 1500,330.71 1551.18,330.71 1307.09,358.27 1362.2,358.27 1417.32,358.27 1472.44,358.27 1527.56,358.27 1334.65,385.83 1389.76,385.83 1444.88,385.83 1500,385.83 1362.2,409.45 1472.44,409.45 1417.32,413.39 1362.2,460.63 1417.32,460.63 1472.44,460.63 1389.76,488.19 1444.88,488.19 1362.2,515.75 1417.32,515.75 1472.44,515.75
PHC: J3.4 R6.1 TP3.1 | length 365.6
  Top Layer w10: R6.1@2283.46,488.19 2283.46,573.61 cw(c2293.46,573.61) 2286.38,580.66 2302.88,597.17 cw(c2309.94,590.08) 2309.94,600.08 2484.68,600.08 cw(c2484.68,590.08) 2494.68,590.08 J3.4@2494.68,539.37
  other v1: 2283.46,137.8 2228.35,141.73 2338.58,141.73 2200.79,165.35 2255.91,165.35 2311.02,165.35 2366.14,165.35 2173.23,192.91 2228.35,192.91 2283.46,192.91 2338.58,192.91 2393.7,192.91 2149.61,220.47 2200.79,220.47 2255.91,220.47 2311.02,220.47 2366.14,220.47 2417.32,220.47 2173.23,248.03 2228.35,248.03 2338.58,248.03 2393.7,248.03 2145.67,275.59 2200.79,275.59 2366.14,275.59 2421.26,275.59 2173.23,303.15 2228.35,303.15 2338.58,303.15 2393.7,303.15 2149.61,330.71 2200.79,330.71 2255.91,330.71 2311.02,330.71 2366.14,330.71 2417.32,330.71 2173.23,358.27 2228.35,358.27 2283.46,358.27 2338.58,358.27 2393.7,358.27 2200.79,385.83 2255.91,385.83 2311.02,385.83 2366.14,385.83 2228.35,409.45 2338.58,409.45 2283.46,413.39 2228.35,460.63 2283.46,460.63 2338.58,460.63 2255.91,488.19 2311.02,488.19 2228.35,515.75 2283.46,515.75 2338.58,515.75
SHA: J1.3 J6.1 Q1.3 Q4.2 R1.1 R4.2 | length 926.8
  Top Layer w10: R4.2@551.18,732.28 551.18,651.48 ccw(c561.18,651.48) 554.07,644.46 575.45,623.07 ccw(c582.51,630.16) 582.51,620.16 752.4,620.16 ccw(c752.4,630.16) 762.4,630.16 J1.3@762.4,681.1
  Top Layer w15: v1(777.56,1131.89) 966.87,1131.89 ccw(c966.87,1161.89) 988.07,1140.66 1002.51,1155.11 ccw(c981.29,1176.31) 1011.29,1176.31 1011.29,1345.64 ccw(c981.29,1345.64) 1002.52,1366.84 978.69,1390.66 cw(c999.88,1411.9) 969.88,1411.9 J6.1@969.88,1468.5
  other v1: 496.06,704.72 551.18,704.72 606.3,704.72 523.62,732.28 578.74,732.28 496.06,759.84 551.18,759.84 606.3,759.84 511.81,807.09 570.87,807.09 629.92,807.09 688.98,807.09 748.03,807.09 807.09,807.09 541.34,836.61 600.39,836.61 659.45,836.61 718.5,836.61 777.56,836.61 511.81,866.14 570.87,866.14 629.92,866.14 688.98,866.14 748.03,866.14 807.09,866.14 541.34,895.67 600.39,895.67 659.45,895.67 718.5,895.67 777.56,895.67 511.81,925.2 570.87,925.2 629.92,925.2 688.98,925.2 748.03,925.2 807.09,925.2 541.34,954.72 600.39,954.72 659.45,954.72 718.5,954.72 777.56,954.72 511.81,984.25 570.87,984.25 629.92,984.25 688.98,984.25 748.03,984.25 807.09,984.25 541.34,1013.78 600.39,1013.78 659.45,1013.78 718.5,1013.78 777.56,1013.78 511.81,1043.31 570.87,1043.31 629.92,1043.31 688.98,1043.31 748.03,1043.31 807.09,1043.31 541.34,1072.83 600.39,1072.83 659.45,1072.83 718.5,1072.83 777.56,1072.83 511.81,1102.36 570.87,1102.36 629.92,1102.36 688.98,1102.36 748.03,1102.36 807.09,1102.36 541.34,1131.89 600.39,1131.89 659.45,1131.89 718.5,1131.89 511.81,1161.42 570.87,1161.42 629.92,1161.42 688.98,1161.42 748.03,1161.42 807.09,1161.42 511.81,1212.6 559.06,1212.6 606.3,1212.6 653.54,1212.6 700.79,1212.6 748.03,1212.6 795.28,1212.6 511.81,1244.09 559.06,1244.09 606.3,1244.09 653.54,1244.09 700.79,1244.09 748.03,1244.09 795.28,1244.09 511.81,1275.59 559.06,1275.59 606.3,1275.59 653.54,1275.59 700.79,1275.59 748.03,1275.59 795.28,1275.59
SHB: J2.3 J4.1 Q2.3 Q5.2 R2.1 R5.2 | length 918.2
  Top Layer w10: R5.2@1417.32,732.28 1417.32,657.69 ccw(c1427.32,657.69) 1420.21,650.66 1447.61,623.26 ccw(c1454.66,630.35) 1454.66,620.35 1618.54,620.35 ccw(c1618.54,630.35) 1628.54,630.35 J2.3@1628.54,681.1
  Top Layer w15: v1(1643.7,1131.89) 1821.76,1131.89 ccw(c1821.76,1161.89) 1842.96,1140.66 1870.94,1168.65 ccw(c1849.71,1189.85) 1879.71,1189.85 1879.71,1345.46 ccw(c1849.71,1345.46) 1870.93,1366.68 1844.8,1392.8 cw(c1866.02,1414.01) 1836.02,1414.01 J4.1@1836.02,1468.5
  other v1: 1362.2,704.72 1417.32,704.72 1472.44,704.72 1389.76,732.28 1444.88,732.28 1362.2,759.84 1417.32,759.84 1472.44,759.84 1377.95,807.09 1437.01,807.09 1496.06,807.09 1555.12,807.09 1614.17,807.09 1673.23,807.09 1407.48,836.61 1466.54,836.61 1525.59,836.61 1584.65,836.61 1643.7,836.61 1377.95,866.14 1437.01,866.14 1496.06,866.14 1555.12,866.14 1614.17,866.14 1673.23,866.14 1407.48,895.67 1466.54,895.67 1525.59,895.67 1584.65,895.67 1643.7,895.67 1377.95,925.2 1437.01,925.2 1496.06,925.2 1555.12,925.2 1614.17,925.2 1673.23,925.2 1407.48,954.72 1466.54,954.72 1525.59,954.72 1584.65,954.72 1643.7,954.72 1377.95,984.25 1437.01,984.25 1496.06,984.25 1555.12,984.25 1614.17,984.25 1673.23,984.25 1407.48,1013.78 1466.54,1013.78 1525.59,1013.78 1584.65,1013.78 1643.7,1013.78 1377.95,1043.31 1437.01,1043.31 1496.06,1043.31 1555.12,1043.31 1614.17,1043.31 1673.23,1043.31 1407.48,1072.83 1466.54,1072.83 1525.59,1072.83 1584.65,1072.83 1643.7,1072.83 1377.95,1102.36 1437.01,1102.36 1496.06,1102.36 1555.12,1102.36 1614.17,1102.36 1673.23,1102.36 1407.48,1131.89 1466.54,1131.89 1525.59,1131.89 1584.65,1131.89 1377.95,1161.42 1437.01,1161.42 1496.06,1161.42 1555.12,1161.42 1614.17,1161.42 1673.23,1161.42 1377.95,1212.6 1425.2,1212.6 1472.44,1212.6 1519.68,1212.6 1566.93,1212.6 1614.17,1212.6 1661.42,1212.6 1377.95,1244.09 1425.2,1244.09 1472.44,1244.09 1519.69,1244.09 1566.93,1244.09 1614.17,1244.09 1661.42,1244.09 1377.95,1275.59 1425.2,1275.59 1472.44,1275.59 1519.69,1275.59 1566.93,1275.59 1614.17,1275.59 1661.42,1275.59
SHC: J3.3 J5.1 Q3.3 Q6.2 R3.1 R6.2 | length 921.3
  Top Layer w10: R6.2@2283.46,732.28 2283.46,648.39 ccw(c2293.46,648.39) 2286.35,641.36 2304.72,622.99 ccw(c2311.77,630.08) 2311.77,620.08 2484.68,620.08 ccw(c2484.68,630.08) 2494.68,630.08 J3.3@2494.68,681.1
  Top Layer w15: v1(2509.84,1131.89) 2681.71,1131.89 ccw(c2681.71,1161.89) 2702.91,1140.66 2739.26,1177.01 ccw(c2718.03,1198.21) 2748.03,1198.13 2748.03,1381.47 ccw(c2718.03,1381.47) 2739.24,1402.68 2709.23,1432.7 J5.1@2702.17,1468.5
  other v1: 2228.35,704.72 2283.46,704.72 2338.58,704.72 2255.91,732.28 2311.02,732.28 2228.35,759.84 2283.46,759.84 2338.58,759.84 2244.09,807.09 2303.15,807.09 2362.2,807.09 2421.26,807.09 2480.32,807.09 2539.37,807.09 2273.62,836.61 2332.68,836.61 2391.73,836.61 2450.79,836.61 2509.84,836.61 2244.09,866.14 2303.15,866.14 2362.2,866.14 2421.26,866.14 2480.32,866.14 2539.37,866.14 2273.62,895.67 2332.68,895.67 2391.73,895.67 2450.79,895.67 2509.84,895.67 2244.09,925.2 2303.15,925.2 2362.2,925.2 2421.26,925.2 2480.32,925.2 2539.37,925.2 2273.62,954.72 2332.68,954.72 2391.73,954.72 2450.79,954.72 2509.84,954.72 2244.09,984.25 2303.15,984.25 2362.2,984.25 2421.26,984.25 2480.32,984.25 2539.37,984.25 2273.62,1013.78 2332.68,1013.78 2391.73,1013.78 2450.79,1013.78 2509.84,1013.78 2244.09,1043.31 2303.15,1043.31 2362.2,1043.31 2421.26,1043.31 2480.32,1043.31 2539.37,1043.31 2273.62,1072.83 2332.68,1072.83 2391.73,1072.83 2450.79,1072.83 2509.84,1072.83 2244.09,1102.36 2303.15,1102.36 2362.2,1102.36 2421.26,1102.36 2480.32,1102.36 2539.37,1102.36 2273.62,1131.89 2332.68,1131.89 2391.73,1131.89 2450.79,1131.89 2244.09,1161.42 2303.15,1161.42 2362.2,1161.42 2421.26,1161.42 2480.32,1161.42 2539.37,1161.42 2244.09,1212.6 2291.34,1212.6 2338.58,1212.6 2385.83,1212.6 2433.07,1212.6 2480.31,1212.6 2527.56,1212.6 2244.09,1244.09 2291.34,1244.09 2338.58,1244.09 2385.83,1244.09 2433.07,1244.09 2480.31,1244.09 2527.56,1244.09 2244.09,1275.59 2291.34,1275.59 2338.58,1275.59 2385.83,1275.59 2433.07,1275.59 2480.31,1275.59 2527.56,1275.59